# Allegro board PIC887_SENSORS.brd
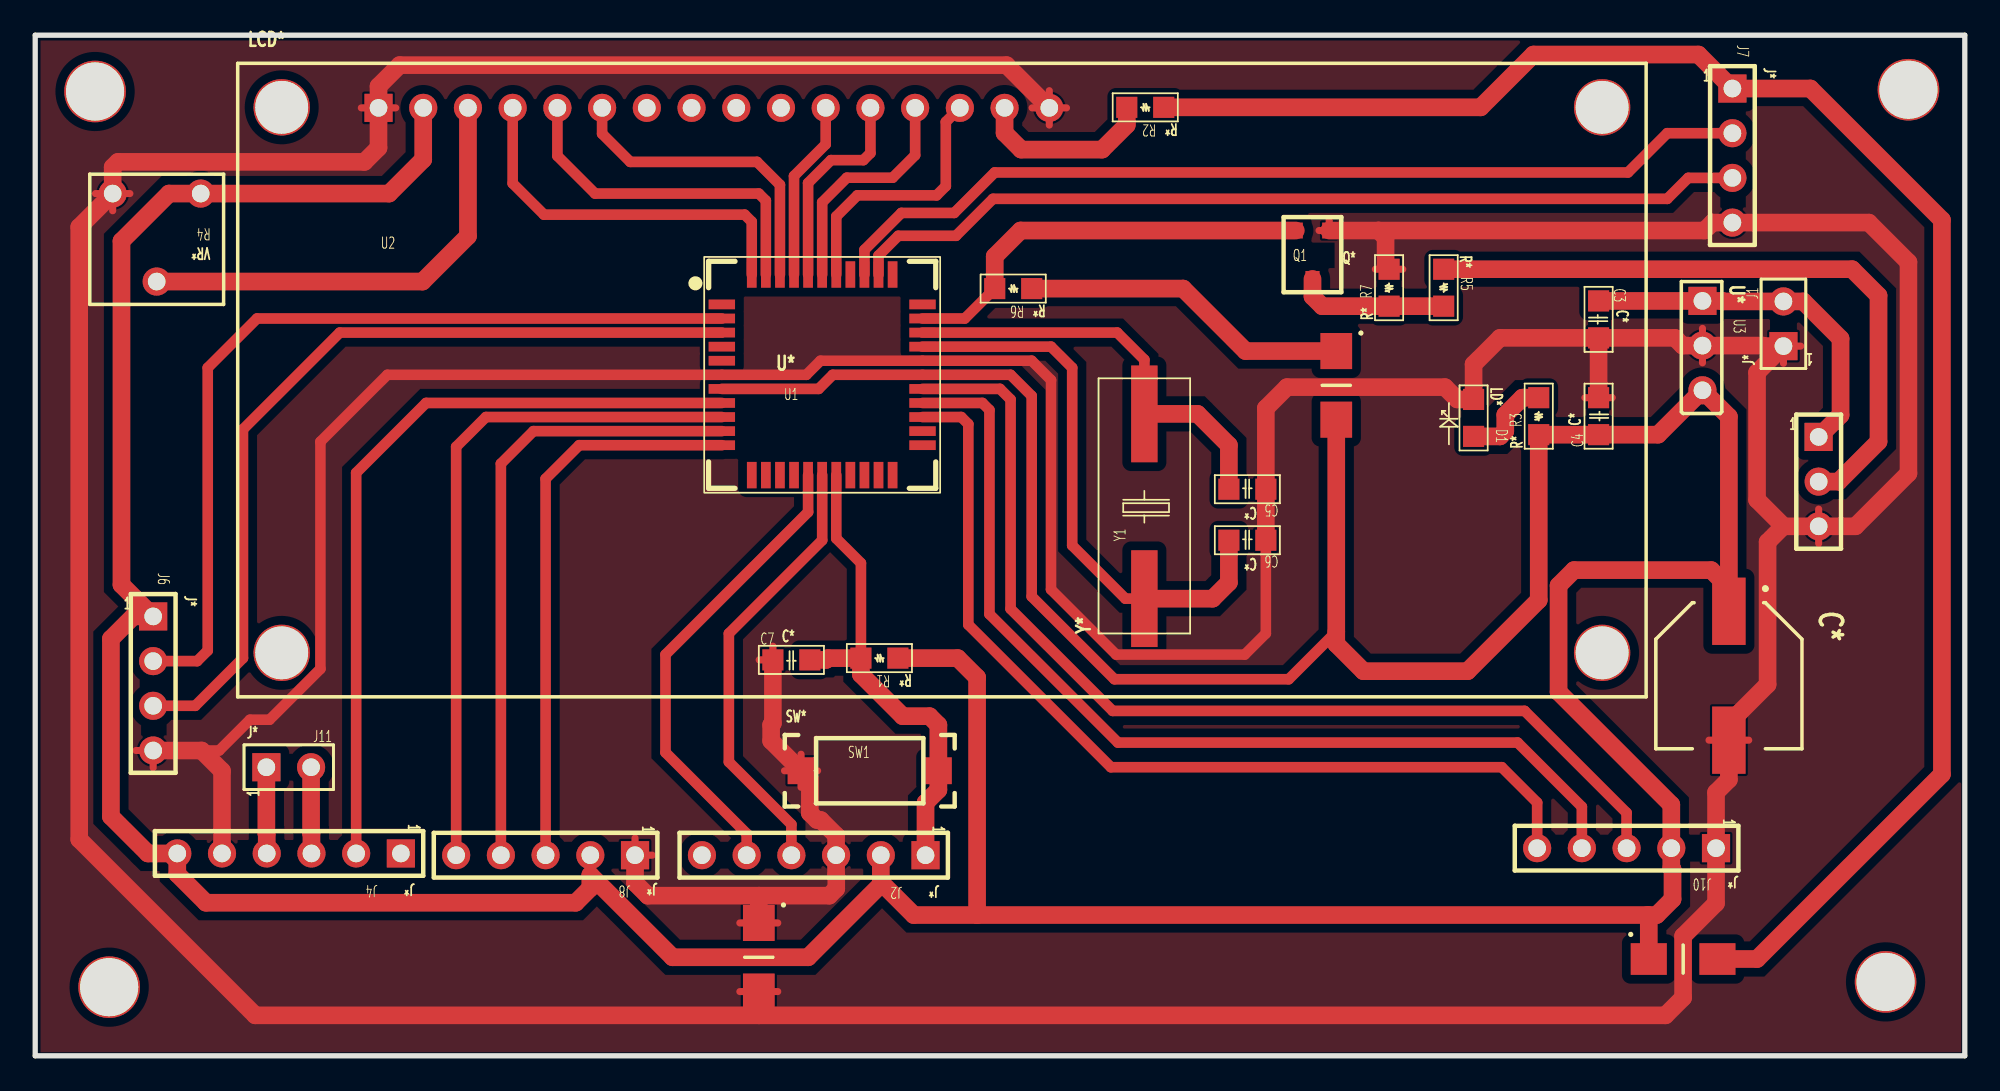
[diagram p0: board, top side]
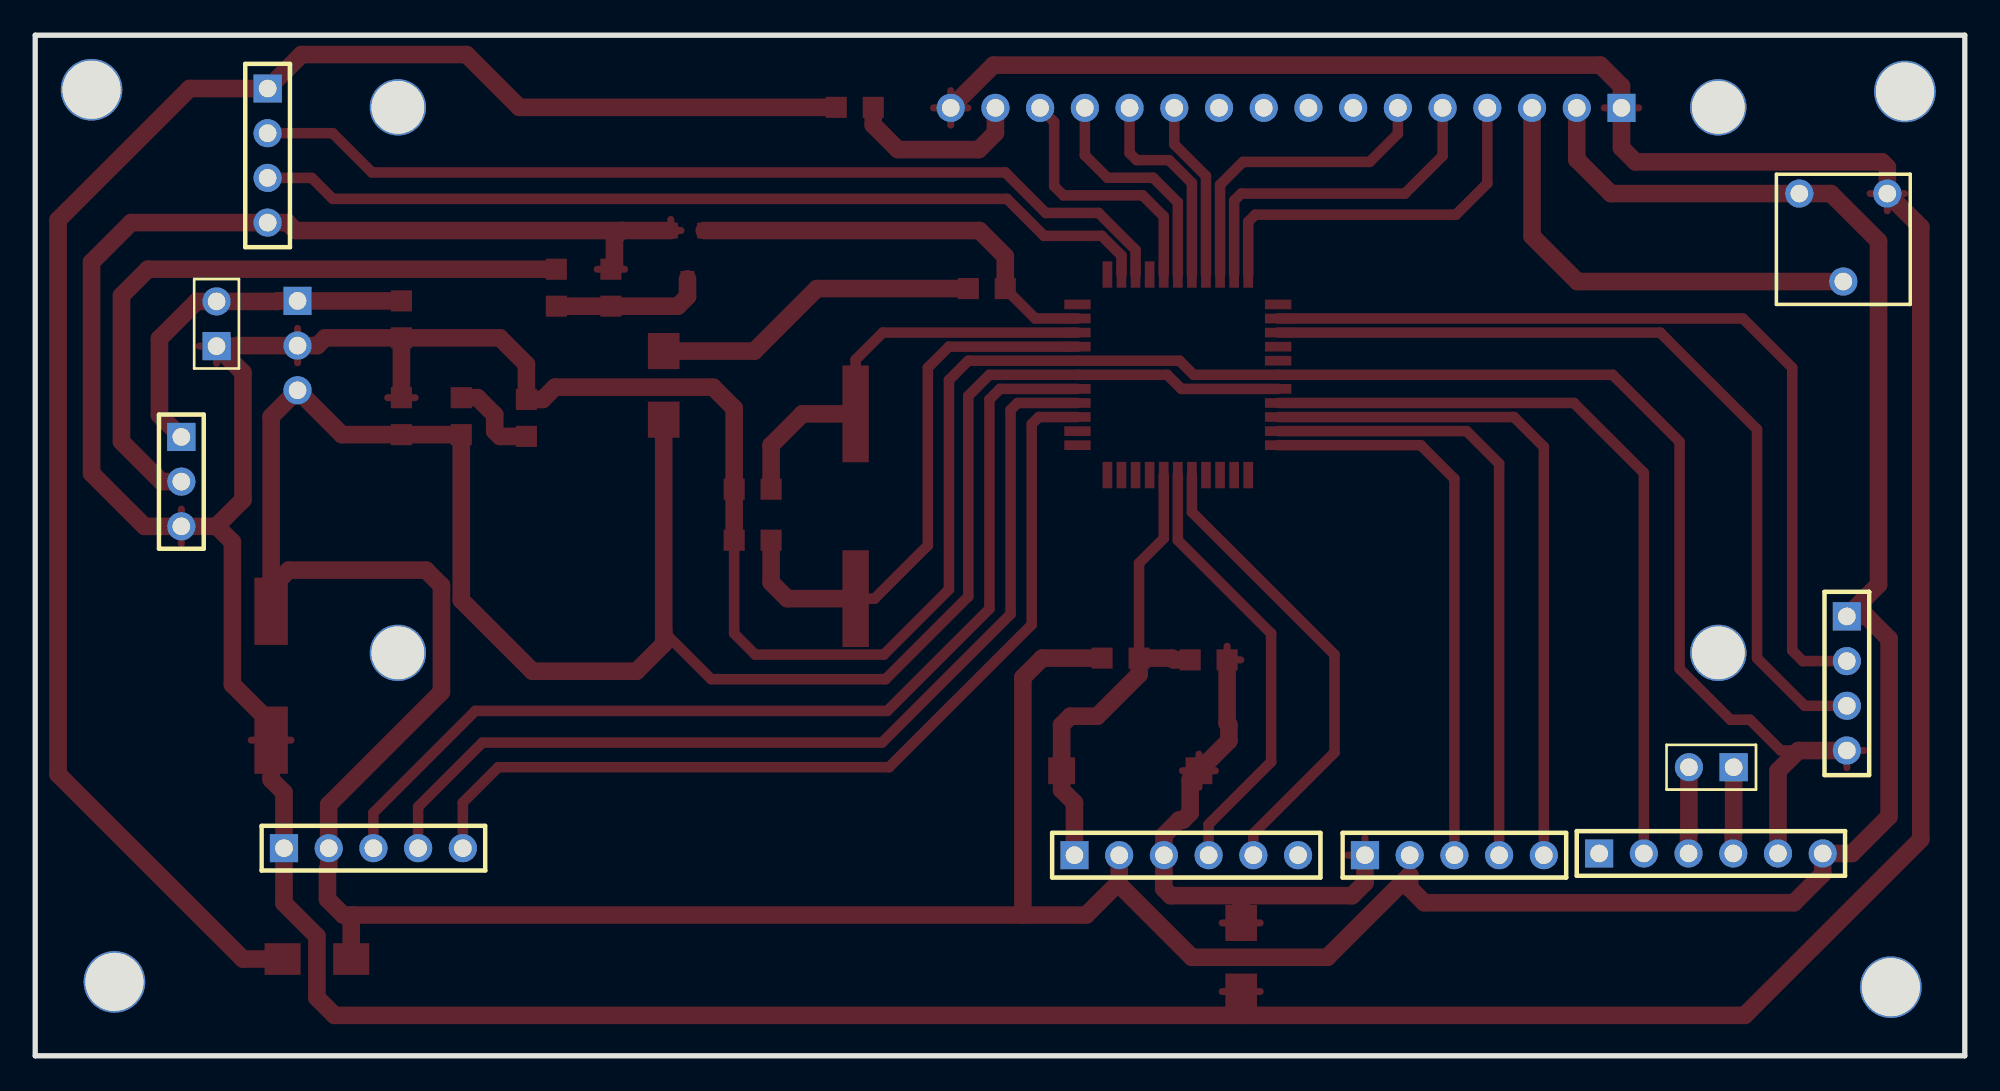
[diagram p1: board, bottom side, seen from below]

Outline 109.6 x 58 mm; copper layers: TOP, BOTTOM. Coordinates in mm from the lower left corner of the outline.
Outline path: 0,58 109.6,58 109.6,0 0,0 0,58

## Design rules (mm)
constraint set DEFAULT: min track width 0.4

## Placement (name value [footprint] x y rotation side)
C3  100nF  [CAP_SMD_0805]  88.8 42.9 270 top
C4  100nF  [CAP_SMD_0805]  88.8 35.3 90 top
C5  33pF  [CAP_SMD_0805]  69.9 32.2 180 top
C6  33pF  [CAP_SMD_0805]  69.9 29.3 180 top
C7  1uF  [CAP_SMD_0805]  41.9 22.5 0 top
C8  470uF  [CAP_SMD_SIZEF]  96.2 21.6 270 top
D1  LED  [LED_SMD_0805]  81.7 37.3 270 top
J1  12V IN  [J1_2_254]  99.3 41.6 90 top
J2  CONG NAP  [J1_6_254]  49.3 11.4 180 top
J3  CAM BIEN TIEM CAN  [J1_3_254]  101.3 33.9 270 top
J4  CON6  [J1_6_254]  19.5 11.5 180 top
J6  LOADCELL  [J1_4_254]  6.7 23.7 270 top
J7  SIEUAM  [J1_4_254]  96.4 53.7 270 top
J8  PT100  [J1_5_254]  32.8 11.4 180 top
J10  Thermal Couple  [J1_5_254]  94.2 11.8 180 top
J11  Motor  [J1_2_254]  14.4 16.4 0 top
NOREF  -  [unnamed]  4.2 3.9 0 top
NOREF#2  -  [unnamed]  106.4 54.9 0 top
NOREF#3  -  [unnamed]  105.1 4.2 0 top
NOREF#4  -  [unnamed]  3.4 54.8 0 top
Q1  C1825  [SOT23]  73.5 46.9 0 top
R1  10K  [RES_SMD_0805]  49 22.6 180 top
R2  330  [RES_SMD_0805]  64.1 53.9 180 top
R3  1K  [RES_SMD_0805]  85.4 35.3 90 top
R4  10K  [BIENTRO]  6.9 46.5 180 top
R5  4.7K  [RES_SMD_0805]  80 44.7 270 top
R6  1K  [RES_SMD_0805]  56.6 43.6 180 top
R7  2.7K  [RES_SMD_0805]  76.9 42.6 90 top
R8  0R  [RES_SMD_1206]  41.1 5.6 270 top
R9  R  [RES_SMD_1206]  93.6 5.5 0 top
R10  R  [RES_SMD_1206]  73.9 38.1 270 top
SW1  RESET  [SMD_2PIN_BUTTON]  47.4 16.2 0 top
U1  pic16f884/887-TQFP44  [TQFP_10_10_1_44]  39 33 0 top
U2  -  [LCD1602]  51.5 38.4 0 top
U3  LM7805  [TO220]  94.7 42.9 270 top
Y1  20MHz  [CRYSTAL_HC_49]  63 29.9 90 top

## Library data of the parts
C3-C7 = CAPACITOR NON-POL
C8 = CAP POL
D1 = LED
J1 J11 = CON2
J2 J4 = CON6
J3 = CON3
J6 J7 = CON4
J8 J10 = CON5
Q1 = NPN ECB
R1-R3 R5-R10 = R
R4 = RESISTOR VAR
SW1 = SW_PB_SPST
U1 = pic16f884/887-TQFP44_4
U2 = LCD1602_6
U3 = LM7805_2
Y1 = CRYSTAL

## Footprints (pads in the part's own frame, mm; a bottom-side part is the same pattern mirrored in y, then rotated)
BIENTRO
  round 1.6 hole 1: 1(-2.5,-2.5) 2(0,2.5) 3(2.5,-2.5)
CAP_SMD_0805
  rect 1.2x1.2 smd: 1(0,0) 2(2.1,0)
CAP_SMD_SIZEF
  rect 3.825x1.9 smd: 1(-3.663,0) 2(3.663,0)
CRYSTAL_HC_49
  rect 5.5x1.5 smd: 1(-3.92,0) 2(6.58,0)
J1_2_254
  rect 1.6x1.6 hole 1: 1(-1.27,0)
  round 1.6 hole 1: 2(1.27,0)
J1_3_254
  rect 1.6x1.6 hole 1: 1(-1.27,0)
  round 1.6 hole 1: 2(1.27,0) 3(3.81,0)
J1_4_254
  rect 1.6x1.6 hole 1: 1(-1.27,0)
  round 1.6 hole 1: 2(1.27,0) 3(3.81,0) 4(6.35,0)
J1_5_254
  rect 1.6x1.6 hole 1: 1(-1.27,0)
  round 1.6 hole 1: 2(1.27,0) 3(3.81,0) 4(6.35,0) 5(8.89,0)
J1_6_254
  rect 1.6x1.6 hole 1: 1(-1.27,0)
  round 1.6 hole 1: 2(1.27,0) 3(3.81,0) 4(6.35,0) 5(8.89,0) 6(11.43,0)
LCD1602
  rect 1.6x1.6 hole 1: 1(-32,15.47)
  round 1.6 hole 1: 2(-29.46,15.47) 3(-26.92,15.47) 4(-24.38,15.47) 5(-21.84,15.47) 6(-19.3,15.47) 7(-16.76,15.47) 8(-14.22,15.47) 9(-11.68,15.47) 10(-9.14,15.47) 11(-6.6,15.47) 12(-4.06,15.47) 13(-1.52,15.47) 14(1.02,15.47) 15(3.56,15.47) 16(6.1,15.47)
  round 3.2 hole 3: 17(37.5,15.5) 18(37.5,-15.5) 19(-37.5,-15.5) 20(-37.5,15.5)
LED_SMD_0805
  rect 1.2x1.2 smd: 1(0,0) 2(2.1,0)
RES_SMD_0805
  rect 1.2x1.2 smd: 1(0,0) 2(2.1,0)
RES_SMD_1206
  rect 2.05x1.8 smd: 1(-1.95,0) 2(1.95,0)
SMD_2PIN_BUTTON
  rect 1.524x1.524 smd: 1(-3.9,0) 2(3.9,0)
SOT23
  rect 0.8x0.9 smd: 1(0,0) 2(-1.9,0) 3(-0.95,-2.75)
TO220
  rect 1.6x1.6 hole 1: 1(0,0)
  round 1.6 hole 1: 2(2.54,0) 3(5.08,0)
TQFP_10_10_1_44
  rect 1.5x0.55 smd: 1(0,9.7) 2(0,8.9) 3(0,8.1) 4(0,7.3) 5(0,6.5) 6(0,5.7) 7(0,4.9) 8(0,4.1) 9(0,3.3) 10(0,2.5) 11(0,1.7) 23(11.4,1.7) 24(11.4,2.5) 25(11.4,3.3) 26(11.4,4.1) 27(11.4,4.9) 28(11.4,5.7) 29(11.4,6.5) 30(11.4,7.3) 31(11.4,8.1) 32(11.4,8.9) 33(11.4,9.7)
  rect 0.55x1.5 smd: 12(1.7,0) 13(2.5,0) 14(3.3,0) 15(4.1,0) 16(4.9,0) 17(5.7,0) 18(6.5,0) 19(7.3,0) 20(8.1,0) 21(8.9,0) 22(9.7,0) 34(9.7,11.4) 35(8.9,11.4) 36(8.1,11.4) 37(7.3,11.4) 38(6.5,11.4) 39(5.7,11.4) 40(4.9,11.4) 41(4.1,11.4) 42(3.3,11.4) 43(2.5,11.4) 44(1.7,11.4)
unnamed
  round 3.5 hole 3.3: (0,0)

## Nets
5V: C4.1 C8.1 J2.2 J4.6 J6.1 J7.1 J8.2 J10.2 R1.1 R2.1 R3.1 R4.1 R6.1 R9.1 R9.2 R10.1 R10.2 U1.7 U1.28 U2.2 U3.3(OUT)
12V: C3.1 J1.2 J3.1 U3.1
GND: C3.2 C4.2 C5.1 C6.1 C7.1 C8.2 D1.1(CATHODE) J1.1 J2.3 J3.3 J4.5 J6.4 J7.4 J8.1 J10.1 Q1.1(E) R4.3 R7.2 R8.1 R8.2 SW1.1 U1.6 U1.29(VSS1) U2.1 U2.16 U3.2
N00401: C7.2 J2.1 R1.2 SW1.2 U1.18
N00603: R2.2 U2.15
N00903: D1.2 R3.2
N01059: U1.44 U2.4
N01063: U1.43 U2.5
N01067: U1.42 U2.6
N01071: U1.41 U2.11
N01075: U1.40 U2.12
N01079: U1.39 U2.13
N01083: U1.38 U2.14
N01224: R4.2(WIPER) U2.3(VO)
N01493: J3.2 R5.1
N01522: Q1.3 R5.2 R7.1
N01660: Q1.2 R6.2 U1.32
N01892: J2.4 U1.17
N01896: J2.5 U1.16
N02044: J4.4 J11.1
N02048: J4.3 J11.2
N02052: J4.2 U1.8
N04224: J6.2 U1.2
N04228: J6.3 U1.3
N04350: J7.2 U1.36
N04354: J7.3 U1.35
N04419: J8.4 U1.10
N04423: J8.5 U1.9
N09118: C6.2 U1.30 Y1.1
N09122: C5.2 U1.31 Y1.2
N10941: J10.3 U1.27
N10947: J10.4 U1.26
N10953: J10.5 U1.25
N14068: J8.3 U1.11

Pads without a net: J2 6; J4 1; U1 1 4 5 12 13 14 15 19 20 21 22 23 24 33 34 37; U2 7 8 9 10 17 18 19 20

## Routing (per net, layer and track width the routed paths; a pad name or vN(x,y) marks a point on that pad's centre or on a via; arc(x,y) is an arc through that point)
5V: length 435.5
  TOP w0.4: 31.53,10.27 J8.2 ; 96.2,26.22 C8.1
  TOP w0.6: U1.7 44.5,37.9 45.3,38.7 U1.28 55.4,38.7 56.6,37.5 56.6,26.1 61.3,21.4 71.2,21.4 73.9,24.1
  TOP w1: R1.1 52.4,22.6 53.5,21.5 53.5,8 ; R10.2 73.9,23.4 75.44,21.86 81.36,21.86 85.4,25.9 R3.1 C4.1 92.18,35.3 U3.3 96.2,36.32 96.2,26.6 ; R6.1 65.2,43.6 68.75,40.05 R10.1 ; 96.2,26.6 96.2,26.22 ; 96.2,26.6 95.2,27.6 87.4,27.6 86.53,26.73 86.53,20.67 92.93,14.27 J10.2 92.93,10.67 93,10.6 93,8.9 92.1,8 91.6,8 ; 48.03,9.87 49.9,8 53.5,8 ; 48.03,9.87 48.03,9.73 43.9,5.6 36.2,5.6 31.53,10.27 31.53,9.53 30.7,8.7 9.7,8.7 8.07,10.33 J4.6 6.4,11.5 4.3,13.6 4.3,23.7 5.57,24.97 J6.1 4.9,26.77 4.9,46.3 7.6,49 R4.1 20.1,49 22.04,50.94 U2.2 ; 48.03,9.87 J2.2 ; R9.1 91.65,7.95 91.6,8 ; R9.2 97.8,5.5 108.3,16 108.3,47.5 100.83,54.97 J7.1 94.47,56.9 85.1,56.9 82.1,53.9 R2.1 ; 91.6,8 53.5,8
12V: length 20.7
  TOP w1: J3.1 102.54,36.41 102.54,40.75 100.43,42.87 J1.2 95.86,42.87 95.83,42.9 U3.1 C3.1
GND: length 507.2
  TOP w0.4: 5.72,17.35 J6.4 6.7,16.37 ; 41.9,23.28 C7.1 41.12,22.5 ; 72.92,46.9 Q1.1 73.5,47.53 ; 100.28,40.33 J1.1 99.3,39.35 ; 88.02,37.4 C4.2 89.58,37.4 ; 40.02,7.55 R8.1 42.18,7.55 ; 18.52,53.87 U2.1 20.48,53.87 ; R8.2 42.18,3.65 ; R8.2 40.02,3.65 ; R8.2 41.1,2.3 ; 94.7,39.38 U3.2 94.7,41.34 ; U2.16 57.6,54.85 ; U2.16 57.6,52.89 ; U2.16 56.62,53.87 ; U2.16 58.58,53.87 ; 76.12,44.7 R7.2 ; R7.2 76.9,45.48 ; R7.2 77.68,44.7 ; 101.3,31.07 J3.3 101.3,29.11 ; 34.07,12.38 J8.1 35.05,11.4 ; 97.33,17.94 C8.2 95.07,17.94 ; 43.5,15.26 SW1.1 ; SW1.1 44.44,16.2 ; SW1.1 43.5,17.14 ; SW1.1 42.56,16.2 ; 3.42,49 R4.3 ; R4.3 4.4,48.02 ; R4.3 5.38,49
  TOP w0.6: C6.1 69.9,24 68.7,22.8 61.4,22.8 57.7,26.5 57.7,38.4 56.6,39.5 U1.29 44.6,39.5 43.8,38.7 U1.6 20,38.7 16.2,34.9 16.2,21.99 13.31,19.1 12.2,19.1 10.45,17.35 9.45,17.35
  TOP w1: 76.3,46.9 94.82,46.9 95.27,47.35 J7.4 104.15,47.35 106.4,45.1 106.4,33.1 103.39,30.09 J3.3 99.31,30.09 99.3,30.1 ; 76.3,46.9 Q1.1 ; 76.3,46.9 76.7,46.5 76.7,44.9 R7.2 ; C7.1 41.9,18.9 41.8,18.8 41.8,17.9 SW1.1 44,15.7 44,13.8 44.4,13.4 44.62,13.4 45.49,12.53 J2.3 45.49,10.27 45.5,10.26 45.5,9.5 45.1,9.1 41.1,9.1 ; R8.1 41.1,9.1 ; 41.1,9.1 34.8,9.1 34.07,9.83 J8.1 ; J6.4 9.45,17.35 10.61,16.19 J4.5 ; U2.16 55.17,56.3 20.7,56.3 19.5,55.1 U2.1 19.5,51.6 18.7,50.8 4.7,50.8 4.4,50.5 R4.3 2.5,47.1 2.5,12.3 12.5,2.3 92.6,2.3 93.6,3.3 93.6,6.8 95.47,8.67 J10.1 95.47,14.97 96.2,15.7 C8.2 96.2,18.9 98.4,21.1 98.4,29.2 99.3,30.1 ; 99.3,30.1 97.8,31.6 97.8,38.83 J1.1 98.17,40.33 98.14,40.36 U3.2 93.57,40.36 93.13,40.8 C3.2 ; C6.1 C5.1 69.9,36.8 71.1,38 80.07,38 80.77,37.3 D1.1 81.7,39.3 83.2,40.8 C3.2 ; C3.2 C4.2
N00401: length 28.1
  TOP w0.6: U1.18 45.5,29.4 46.9,28 R1.2
  TOP w1: J2.1 50.57,14.38 51.3,15.11 SW1.2 51.3,18.8 50.8,19.3 49.27,19.3 46.9,21.67 R1.2 45.03,22.6 44.93,22.5 C7.2
N00603: length 10.3
  TOP w1: U2.15 55.06,52.44 56,51.5 60.6,51.5 62,52.9 R2.2
N00903: length 5.2
  TOP w1: D1.2 83.2,35.2 83.5,35.5 83.5,36.43 84.47,37.4 R3.2
N01059: length 21.8
  TOP w0.6: U1.44 40.7,47.4 40.3,47.8 28.9,47.8 27.12,49.58 U2.4
N01063: length 19.8
  TOP w0.6: U2.5 29.66,51.14 31.8,49 41.1,49 41.5,48.6 U1.43
N01067: length 17.9
  TOP w0.6: U2.6 32.2,52.4 33.8,50.8 41,50.8 42.3,49.5 U1.42
N01071: length 10.2
  TOP w0.6: U2.11 44.9,51.8 43.1,50 U1.41
N01075: length 12
  TOP w0.6: U2.12 47.44,51.3 47.04,50.9 45.2,50.9 43.9,49.6 U1.40
N01079: length 13.2
  TOP w0.6: U2.13 49.98,51.18 48.7,49.9 46.1,49.9 44.7,48.5 U1.39
N01083: length 15
  TOP w0.6: U2.14 51.72,53.07 51.72,49.42 51.2,48.9 46.7,48.9 45.5,47.7 U1.38
N01224: length 26
  TOP w1: R4.2 22,44 24.58,46.58 U2.3
N01493: length 38
  TOP w1: R5.1 103.2,44.7 104.7,43.2 104.7,34.9 102.43,32.63 J3.2
N01522: length 8.7
  TOP w1: Q1.3 72.55,43.15 73.1,42.6 R7.1 R5.2
N01660: length 24.3
  TOP w0.6: R6.2 52.8,41.9 U1.32
  TOP w1: Q1.2 55.97,46.9 54.5,45.43 R6.2
N01892: length 25.3
  TOP w0.6: J2.4 42.95,13.15 39.4,16.7 39.4,24 44.7,29.3 U1.17
N01896: length 26.9
  TOP w0.6: U1.16 43.9,30.9 35.8,22.8 35.8,17.24 40.41,12.63 J2.5
N02044: length 4.9
  TOP w1: J11.1 13.13,12.65 13.15,12.63 J4.4
N02048: length 4.9
  TOP w1: J4.3 15.69,12.63 15.67,12.65 J11.2
N02052: length 44
  TOP w0.6: U1.8 22.2,37.1 18.23,33.13 J4.2
N04224: length 49.8
  TOP w0.6: U1.2 12.6,41.9 9.8,39.1 9.8,23.03 9.2,22.43 J6.2
N04228: length 48.7
  TOP w0.6: J6.3 9.09,19.89 11.8,22.6 11.8,35.6 17.3,41.1 U1.3
N04350: length 53.4
  TOP w0.6: U1.36 47.1,45.8 49.2,47.9 52.2,47.9 54.5,50.2 90.47,50.2 92.7,52.43 J7.2
N04354: length 51.4
  TOP w0.6: U1.35 47.9,45.48 49.02,46.6 52.3,46.6 54.4,48.7 92.7,48.7 93.89,49.89 J7.3
N04419: length 35.6
  TOP w0.6: J8.4 26.45,33.65 28.3,35.5 U1.10
N04423: length 39
  TOP w0.6: U1.9 25.6,36.3 23.91,34.61 J8.5
N09118: length 32
  TOP w0.6: U1.30 57.7,40.3 58.9,39.1 58.9,29 61.92,25.98 Y1.1
  TOP w1: Y1.1 66.88,25.98 67.8,26.9 C6.2
N09122: length 24.4
  TOP w0.6: U1.31 61.46,41.1 63,39.56 Y1.2
  TOP w1: Y1.2 66.02,36.48 67.8,34.7 C5.2
N10941: length 58.9
  TOP w0.6: J10.3 90.39,13.81 84.6,19.6 61.2,19.6 55.4,25.4 55.4,37.3 54.8,37.9 U1.27
N10947: length 56.1
  TOP w0.6: U1.26 53.8,37.1 54.2,36.7 54.2,25.1 61.5,17.8 84.2,17.8 87.85,14.15 J10.4
N10953: length 53.3
  TOP w0.6: U1.25 52.6,36.3 53,35.9 53,24.5 61.1,16.4 83.3,16.4 85.31,14.39 J10.5
N14068: length 32.2
  TOP w0.6: J8.3 28.99,32.79 30.9,34.7 U1.11

## Copper pours and planes (outline as drawn; the poured copper is in the pictures)
GND on TOP: 0.3,57.7 0.3,0.2 109.4,0.2 109.4,57.7 ; 28 cut-outs
